# Altium PCB PROC091F.PcbDoc (part 6 of 8)
Units mil, origin at the board's own origin, x right, y up, seen from the top; angles counter-clockwise.
Board outline 3590.95 x 906.17 mil, 8 copper layers (Top Layer, GND1, Sig1, PWR1, PWR2, Sig2, GND2, Bottom Layer), stack 63.146 mil thick; 420 components, 316 nets, 1432 pads, 774 vias.
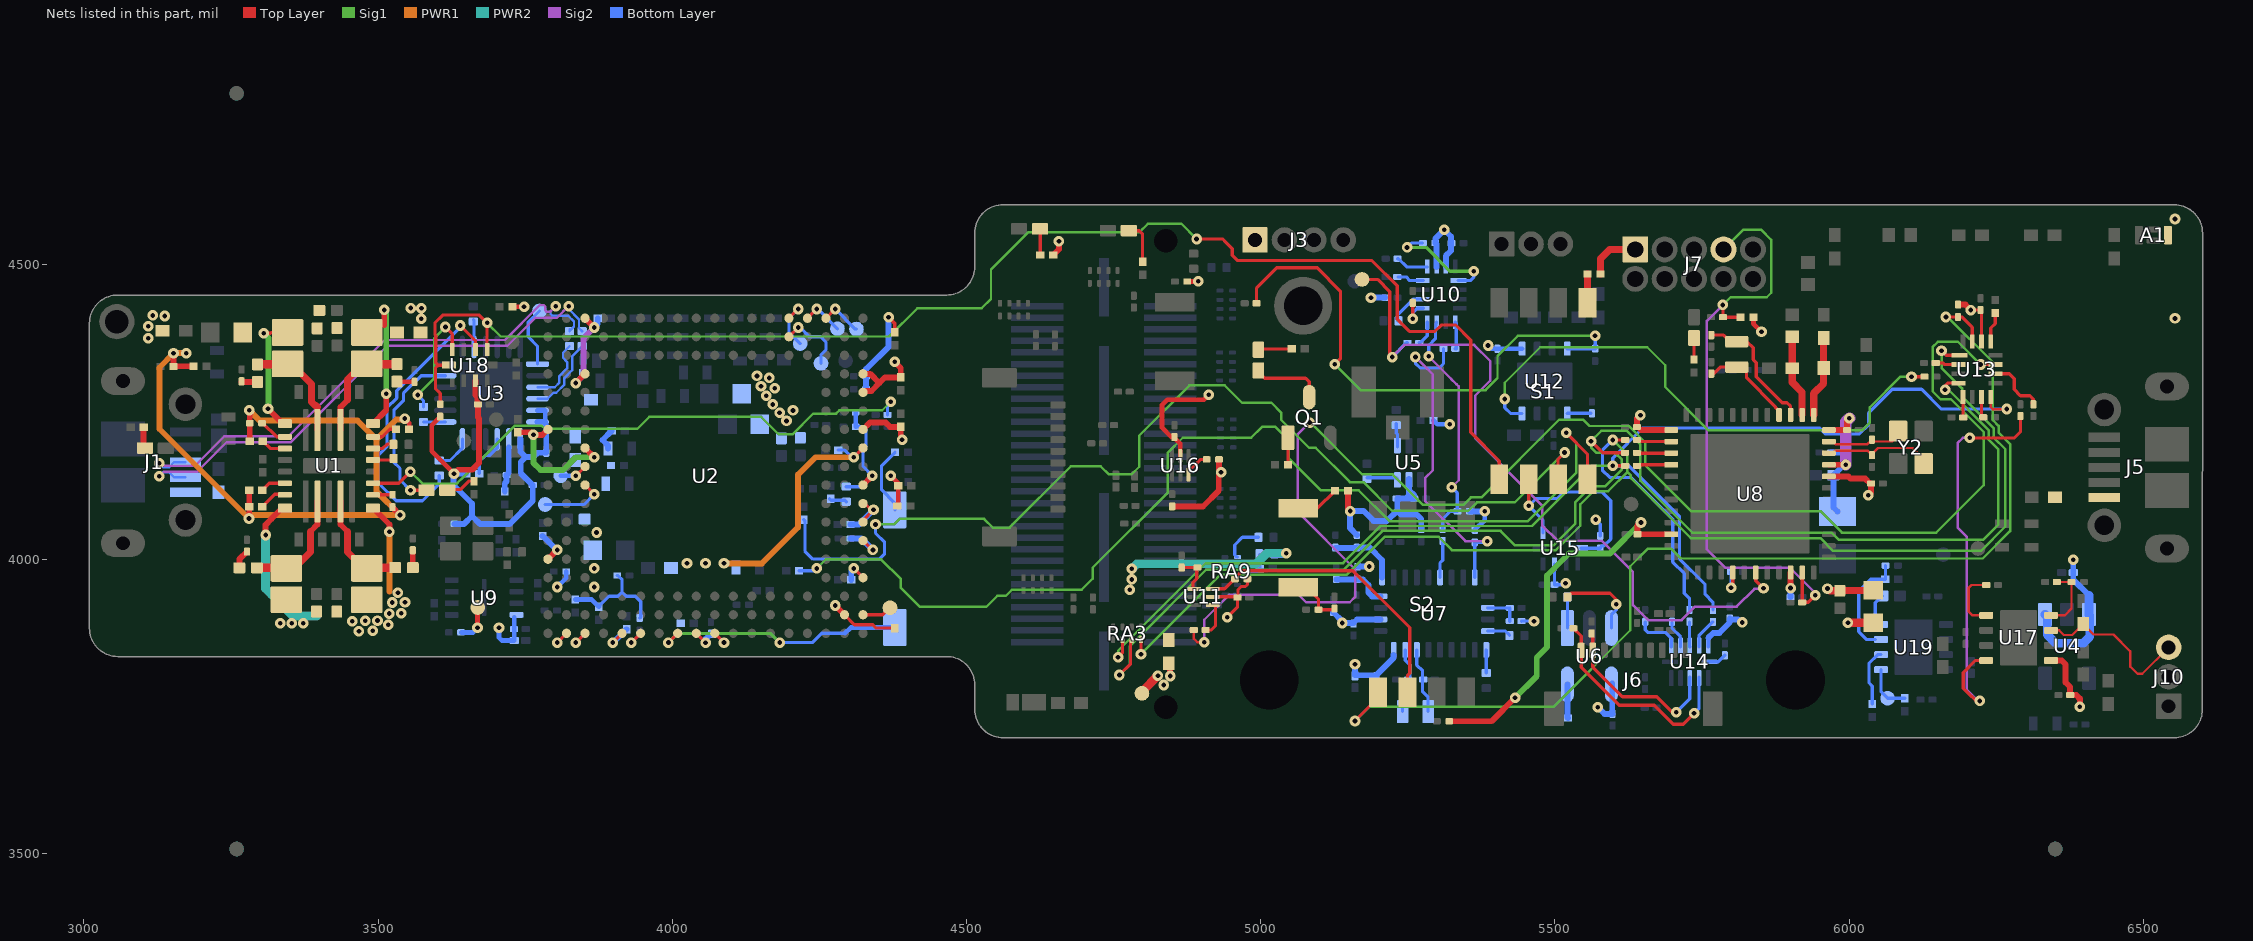
[diagram p11: the nets of this part, all layers, seen from the top]

## Via types
v1: diameter 18, hole 8, Top Layer to Bottom Layer, tented both sides, 737 vias
v2: diameter 19.68, hole 7.87, Top Layer to Bottom Layer, tented both sides, 36 vias
v3: diameter 17, hole 8, Top Layer to Bottom Layer, tented both sides, 1 vias

## Nets (pads, with @x,y where several pads share a name; then routed paths per layer and width w, separated by ;. In a path a pad name is that pad's centre, name@x,y a point inside that pad or via, vN(x,y) a via of type N, cw(c..) or ccw(c..) an arc to the next point about the centre after c; other vN are vias at no path point) (continued)
NetJ10_3: J10.3 R114.2 U17.7 | length 279.6
  Top Layer w4: U17.7@6343.09,3878.8 6356.9,3878.8 6364.64,3871.05 6379.2,3871.05 R114.2@6397.76,3889.61 6415.45,3871.92 6422.58,3871.92 6448.98,3871.92 6477.7,3843.2 6477.7,3817.28 6489.93,3805.05 6498.05,3805.05 J10.3@6543,3850
NetLD1_1: LD1.1 R39.2 | length 36.4
  Top Layer w10: R39.2@3101.69,4224 3101.69,4190.75 LD1.1@3103.94,4188.5
NetLD2_1: LD2.1 R13.2 | length 45.6
  Top Layer w5.5: R13.2@4625.39,4516.76 4625.39,4559.66 4626.81,4561.07 LD2.1@4627.29,4561.55
NetLD3_2: LD3.2 R42.1 | length 70.9
  Top Layer w5.5: LD3.2@4777.82,4558.15 4793.46,4558.15 4799.25,4552.36 R42.1@4799.25,4505.25
NetLD4_1: LD4.1 U3.17 | length 293.7
  Top Layer w5.5: v1(3555.07,4117.07) LD4.1@3582.28,4117.07
  Bottom Layer w5.5: v1(3555.07,4117.07) 3537.25,4134.89 3537.25,4154.13 3527,4164.38 3527,4252.77 3543.12,4268.88 3543.12,4281.51 3573.33,4311.72 U3.17@3614.31,4311.72
NetLD4_2: LD4.2 R15.2 | length 51.7
  Top Layer w5.5: LD4.2@3617.72,4117.07 3618.77,4118.12 3639.5,4118.12 3653.89,4132.51 R15.2@3663,4132.51
NetLD5_1: LD5.1 R107.2 | length 57.1
  Top Layer w5.5: LD5.1@4996.12,4355.74 4997.56,4357.18 R107.2@5052.59,4357.18
NetLD5_2: LD5.2 Q1.3 | length 121.4
  Top Layer w5.5: LD5.2@4996.12,4320.31 4996.12,4317.97 5006.72,4307.37 5076.23,4307.37 5082.37,4301.23 Q1.3@5082.37,4275.33
NetLD6_1: LD6.1 R17.2 | length 36.5
  Top Layer w5.5: R17.2@5736.37,4339.19 LD6.1@5736.37,4375.65
NetQ1_1: Q1.1 R108.2 | length 46.3
  Top Layer w5.5: R108.2@5046.35,4159.98 Q1.1@5046.35,4206.3
NetR2_2: R2.2 R174.1 | length 30.8
  Bottom Layer w5.5: R174.1@4267.1,4102.78 4269.74,4100.14 4271.74,4100.14 4293.06,4100.14 R2.2@4295.7,4097.5
NetR16_2: R16.2 S1.5 | length 49
  Top Layer w12: S1.5@5555.37,4435.46 R16.2@5555.37,4484.46
NetR20_2: R20.2 R29.2 U19.3 | length 178.8
  Bottom Layer w5.5: U19.3@6044.25,3863.26 6029.94,3863.26 6016.37,3876.83 6016.37,3945.46 6036.85,3965.94 R29.2@6061.35,3965.94 6061.6,3966.19 6061.6,3988.69 R20.2@6061.85,3988.94
NetR24_2: R24.2 U19.4 | length 62
  Bottom Layer w5.5: U19.4@6055.1,3888.6 6049.8,3888.6 6044.25,3894.15 6044.25,3926.09 6055.62,3937.46 R24.2@6056.47,3937.46
NetR27_2: R27.2 TP10.1 U19.1 | length 82.5
  Bottom Layer w5.5: U19.1@6054.25,3812.08 6054.25,3774.58 TP10.1@6065.37,3763.46 6094.48,3763.46 R27.2@6094.58,3763.57
NetR30_2: R30.2 U10.10 | length 65.1
  Bottom Layer w5.5: R30.2@5232.52,4404.87 5232.52,4415.19 5259.18,4441.85 U10.10@5276.29,4441.85
NetR40_2: R40.2 U3.9 | length 75.4
  Bottom Layer w5.5: R40.2@3671.81,4145.37 3671.81,4165.8 3681.85,4175.84 3689.03,4175.84 3702.45,4189.27 U3.9@3702.49,4203.87
NetR41_1: R41.1 U3.3 | length 115.3
  Bottom Layer w4: U3.3@3770.97,4292.04 3800.14,4292.04 3808.12,4300.03 3808.12,4311.17 3821.34,4324.39 3821.34,4334.97 3814.23,4342.08 3814.23,4350.59 3825.31,4361.66 R41.1@3825.31,4361.83
NetR51_2: R51.2 U5.1 | length 40.2
  Bottom Layer w5.5: R51.2@5230.37,4230.36 5230.37,4214.38 5232.29,4212.46 U5.1@5232.29,4190.93
NetR57_2: R57.2 U5.6 | length 52.4
  Bottom Layer w5.5: R57.2@5180.56,4138.17 5230.73,4138.17 U5.6@5232.29,4136.6
NetR58_2: R58.2 RA9.5 | length 68.7
  Bottom Layer w5.5: RA9.5@4960.68,4003.38 4959.62,4003.38 4956,4007 4956,4024 4968.94,4036.94 R58.2@4996.2,4036.94
NetR60_1: R60.1 U3.4 | length 133.5
  Bottom Layer w4: U3.4@3770.97,4272.35 3788.06,4272.35 3798.3,4282.59 3802.71,4282.59 3816.62,4296.51 3816.62,4307.65 3829.84,4320.87 3829.84,4344.29 3846.82,4361.26 R60.1@3846.82,4361.83
NetR61_2: R61.2 U3.13 | length 37.1
  Bottom Layer w5.5: R61.2@3577.24,4232.98 U3.13@3614.31,4232.98
NetR62_1: R62.1 U3.20 | length 47.1
  Bottom Layer w5.5: R62.1@3662,4407.2 3663.08,4406.12 U3.20@3663.12,4360.53
NetR63_1: R63.1 U3.12 | length 63.3
  Bottom Layer w5.5: R63.1@3604,4167.58 3622.29,4167.58 3643.43,4188.72 U3.12@3643.43,4203.87
NetR66_2: R66.2 R122.1 U12.8 | length 917.7
  Top Layer w5.5: R66.2@4992.9,4434.77 4992.9,4460.9 5027,4495 5096,4495 5135.53,4455.47 5135.53,4340.53 v1(5126,4331)
  Sig1 w4.2: v1(5126,4331) 5169.73,4287.27 5382.12,4287.27 5402.37,4307.51 5402.37,4345 5436.98,4379.61 v1(5568.26,4379.61)
  Bottom Layer w5.5: U12.8@5520.96,4357.63 R122.1@5568.37,4357.63 5568.37,4379.49 v1(5568.26,4379.61)
NetR67_2: R67.2 U6.1 | length 52.6
  Bottom Layer w5.5: U6.1@5521.17,3882.9 R67.2@5521.17,3935.46
NetR68_2: R68.2 U6.3 | length 142.4
  Top Layer w5.5: R68.2@5521.17,3935.46 5527.83,3942.12 5593.59,3942.12 5604.37,3931.35 v1(5604.37,3923.46)
  Bottom Layer w5.5: U6.3@5595.94,3882.87 5595.94,3905.07 5604.37,3913.5 v1(5604.37,3923.46)
NetR69_2: R69.2 U6.5 | length 57.6
  Bottom Layer w10: U6.5@5521.13,3787.16 5521.13,3730.92 R69.2@5522.09,3729.96
NetR70_1: R70.1 U7.19 | length 40.4
  Bottom Layer w5.5: U7.19@5385.92,3877.69 5416,3877.69 5422.58,3871.12 R70.1@5422.58,3870.14
NetR71_1: R71.1 U7.20 | length 39.5
  Bottom Layer w5.5: R71.1@5383.33,3806.26 5383.33,3845.57 U7.20@5383.46,3845.7
NetR72_2: R72.2 R73.2 U7.17 | length 60
  Bottom Layer w5.5: U7.17@5385.92,3917.06 R73.2@5423.36,3917.06 R72.2@5423.37,3894.46
NetR74_2: R74.2 U11.4 | length 56.4
  Top Layer w5.5: R74.2@4906.37,3879.46 4916.22,3879.46 4923.22,3886.46 4923.22,3919.14 U11.4@4920.42,3921.94
NetR76_1: R76.1 U14.8 | length 47.5
  Bottom Layer w5.5: R76.1@5698.97,3892.42 5698.97,3882.19 5713.48,3867.67 U14.8@5713.48,3850.95
NetR79_1: R79.1 U14.12 | length 32.5
  Bottom Layer w5.5: U14.12@5760.73,3825.36 5777.58,3825.36 R79.1@5788.67,3836.45
NetR86_2: R86.2 U8.15 | length 58.7
  Top Layer w5.5: R86.2@5639.23,4180.57 5639.8,4180.01 U8.15@5697.71,4180.01
NetR87_2: R87.2 U8.14 | length 59.5
  Top Layer w5.5: R87.2@5639.38,4202.46 5642.16,4199.69 U8.14@5697.71,4199.69
NetR92_1: R92.1 U19.2 | length 98.3
  Bottom Layer w5.5: R92.1@6039.37,3753.68 6039.37,3784.11 6033.69,3789.79 6033.69,3822.99 6048.37,3837.67 U19.2@6054.25,3837.67
NetR97_1: R97.1 U7.11 | length 63
  Bottom Layer w5.5: U7.11@5304.72,3968.74 5304.72,3993.45 5309.27,3998 R97.1@5309.27,4029.9
NetR99_1: R99.1 U10.12 | length 45.7
  Bottom Layer w5.5: R99.1@5233.13,4479.52 5247.22,4479.52 5253.4,4473.35 U10.12@5276.29,4473.35
NetR100_2: R100.2 U10.5 | length 48
  Bottom Layer w5.5: U10.5@5330.42,4402.48 5332.42,4400.48 5332.42,4357.63 5330.42,4357.63 R100.2@5330.67,4357.38
NetR101_1: R101.1 U10.13 | length 56.6
  Bottom Layer w5.5: R101.1@5232.37,4510.46 5234.17,4510.46 5248.14,4496.49 U10.13@5283.18,4496.49
NetR105_1: R105.1 R106.1 U11.1 | length 64.2
  Top Layer w5.5: R105.1@4865.78,3985.56 4891.33,3985.56 4891.33,3966.85 4884.99,3960.5 U11.1@4884.99,3949.5
NetR111_1: R111.1 SW3.2 | length 87.5
  Top Layer w5.5: SW3.2@5051.37,4086.32 5096.23,4086.32 R111.1@5126.37,4116.46
NetR112_2: R112.2 U10.8 | length 41.8
  Bottom Layer w5.5: R112.2@5269.37,4367.46 5271.17,4367.46 5283.18,4379.47 U10.8@5283.18,4402.48
NetR113_2: R113.2 U10.9 | length 58
  Top Layer w5.5: v1(5258.37,4408.46) R113.2@5258.37,4435.46
  Bottom Layer w5.5: v1(5258.37,4408.46) 5258.37,4418.25 5266.22,4426.11 U10.9@5275.3,4426.11 U10.9@5276.29,4426.11
NetR115_2: R115.2 R134.1 U17.8 | length 109.7
  Top Layer w4: U17.8@6343.09,3904.39 6366.36,3904.39 6377.97,3916 R134.1@6377.97,3961 R115.2@6352.99,3961
NetR116_1: R116.1 U17.1 | length 104.7
  Top Layer w4: U17.1@6232.85,3904.39 6209.58,3904.39 6202.97,3911 6202.97,3951 6207.97,3956 R116.1@6232.97,3956
NetR120_1: R120.1 U17.4 | length 709.3
  Top Layer w5.5: v1(6205,4206) 6281,4206 6291,4216 R120.1@6291,4242.98 ; v1@6223,3758 v1(6222,3759) 6216,3759 6208.01,3766.99 6207.53,3766.99 6194,3780.52 6194,3807.03 6214.58,3827.61 U17.4@6232.85,3827.61
  Sig2 w4.2: v1(6205,4206) 6193,4206 6184.36,4197.36 6184.36,4053.64 6199.58,4038.42 6199.58,3778.41 6218.99,3759 v1(6222,3759)
NetR121_1: R121.1 U13.2 | length 39.5
  Top Layer w5.5: R121.1@6147.25,4333.23 6159.77,4333.23 6162.37,4330.63 U13.2@6185.63,4330.63
NetR123_1: R123.1 U12.1 | length 40.6
  Bottom Layer w5.5: U12.1@5520.96,4247.39 5521.31,4247.74 R123.1@5561.37,4247.74
NetR125_2: R125.2 R129.1 SW3.1 | length 103.2
  Top Layer w5.5: SW3.1@5051.37,3952.46 5077.69,3952.46 5098.17,3931.98 R125.2@5098.17,3914.04 5123.33,3914.04 R129.1@5125.2,3915.92 ; R129.1@5123.7,3917.42 R129.1@5125.2,3918.92
NetR127_1: R127.1 U12.4 | length 947.1
  Top Layer w5.5: v1(6106,4310) R127.1@6127.98,4310
  Sig1 w4.2: v1(5414.67,4272) 5414.67,4299.67 5475,4360 5656.88,4360 5687.4,4329.48 5687.4,4292.6 5761.21,4218.79 6021.79,4218.79 6035.3,4232.3 6035.3,4258 6087.3,4310 v1(6106,4310)
  Bottom Layer w5.5: v1(5414.67,4272) 5414.67,4257.46 5424.74,4247.39 U12.4@5444.19,4247.39
NetR128_1: R128.1 U13.5 | length 35
  Top Layer w5.5: U13.5@6193.5,4275.51 6193.5,4241.13 R128.1@6193.93,4240.71
NetR131_2: R131.2 U8.29 | length 53.8
  Top Layer w5.5: v1(5799.35,3951.46) 5802.04,3954.16 U8.29@5802.04,3977.25
  Bottom Layer w5.5: v1(5799.35,3951.46) R131.2@5799.35,3978.41
NetR136_1: R136.1 U13.7 | length 35.8
  Top Layer w5.5: U13.7@6225,4275.51 6225,4244 R136.1@6228,4241
NetR139_1: R139.1 U13.10 | length 104.2
  Top Layer w5.5: U13.10@6248.62,4314.88 6272,4314.88 6280.5,4306.38 6280.5,4288.27 6291.05,4277.72 6307.28,4277.72 6313,4272 R139.1@6313,4263 R139.1@6311.28,4264.72
NetR141_1: R141.1 U13.13 | length 51.3
  Top Layer w5.5: U13.13@6240.75,4370 6240.75,4392.75 6248.22,4400.22 R141.1@6248.22,4418.23
NetR160_1: R160.1 U14.10 | length 52.7
  Bottom Layer w5.5: U14.10@5744.98,3850.95 5744.98,3870.7 5745.08,3870.7 5766.49,3892.11 5766.49,3892.21 5767.54,3893.26 R160.1@5768.53,3893.26
NetR161_2: R161.2 U8.16 | length 59.1
  Top Layer w5.5: R161.2@5639.38,4158.46 5641.24,4160.32 U8.16@5697.71,4160.32
NetR166_1: R166.1 U14.9 | length 41.8
  Bottom Layer w5.5: R166.1@5728.8,3892.57 5728.8,3851.38 U14.9@5729.23,3850.95
NetR168_1: R168.1 U14.7 | length 77.4
  Bottom Layer w5.5: R168.1@5653.43,3892.54 5653.43,3879.64 5657.71,3875.36 5687.51,3875.36 5697.73,3865.14 U14.7@5697.73,3850.95
NetR176_1: R176.1 S3.1 | length 117
  Bottom Layer w5.5: S3.1@4378.33,4083.66 4378.33,4095.26 4355.69,4117.91 4355.69,4158.92 R176.1@4378.58,4181.8
NetR178_2: R178.2 U16.3 | length 44.7
  Top Layer w5.5: U16.3@4877.15,4143.71 4877.15,4148.84 4897.78,4169.46 R178.2@4908.17,4169.46
NetTP2_1: TP2.1 U2.C10 | length 47.8
  Top Layer w5.5: v1(3836.01,4141.61) U2.C10@3851.76,4157.36
  Bottom Layer w8: TP2.1@3810.59,4141.77 3835.85,4141.77 v1(3836.01,4141.61)
NetTP3_1: TP3.1 U2.C9 | length 113
  Top Layer w5.5: U2.C9@3851.76,4125.86 v1(3867.5,4110.11)
  Bottom Layer w5.5: TP3.1@3784,4092.76 3850.15,4092.76 v1(3867.5,4110.11)
NetTP6_1: TP6.1 U2.T18 | length 72.5
  Top Layer w5.5: U2.T18@4261.2,4409.33 v1(4276.95,4425.07)
  Bottom Layer w5.5: v1(4276.95,4425.07) 4311.08,4390.94 TP6.1@4313,4390.94
NetTP7_1: TP7.1 U2.R18 | length 71.4
  Top Layer w5.5: U2.R18@4229.71,4409.33 v1(4245.46,4425.07)
  Bottom Layer w5.5: v1(4245.46,4425.07) 4247.21,4425.07 TP7.1@4280.69,4391.59
NetTP8_1: TP8.1 U2.P17 | length 119.4
  Top Layer w5.5: U2.P17@4198.21,4377.83 v1(4213.96,4393.58)
  Bottom Layer w5.5: v1(4213.96,4393.58) 4217.13,4393.58 4232.89,4377.82 4251.98,4377.82 4261.2,4368.6 4261.2,4355.7 4252.7,4347.19 TP8.1@4252.7,4332.6
NetTP9_1: TP9.1 U2.P18 | length 95.6
  Top Layer w5.5: U2.P18@4198.21,4409.33 v1(4213.96,4425.07)
  Bottom Layer w5.5: v1(4213.96,4425.07) 4198.22,4409.33 4198.22,4385.27 TP9.1@4217.3,4366.19
NetTP11_1: TP11.1 U2.V2 | length 50.8
  Top Layer w5.5: U2.V2@4324.2,3905.39 4358.02,3905.39 TP11.1@4370,3917.37
NetTP26_1: TP26.1 U3.1 | length 104.7
  Bottom Layer w5.5: U3.1@3770.97,4331.41 3770.97,4362.04 3755.27,4377.75 3755.27,4402.47 TP26.1@3774.42,4421.63
nRESET: C37.1 J7.7 R89.1 R91.1 U8.35 | length 1057.2
  Top Layer w5.5: v1(5785.39,4431.94) C37.1@5785.39,4411.08 R89.1@5815.36,4411.08 ; U8.35@5920.15,3977.25 R91.1@5920.15,3926.46 5930.43,3926.46 v1(5942.41,3938.44)
  Sig1 w4.2: v1(5785.39,4431.94) 5798.5,4445.04 5859.97,4445.04 5867.61,4452.68 5867.61,4542.36 5849.97,4560 5820.28,4560 J7.7@5786.47,4526.19
  Sig2 w4.2: v1(5785.39,4431.94) 5758.35,4404.89 5758.35,4016.29 5789.04,3985.6 5899.11,3985.6 5942.41,3942.3 v1(5942.41,3938.44)
PGOOD: R31.1 R37.2 RA9.7 | length 66.9
  Bottom Layer w5.5: RA9.7@4960.68,3971.89 4961.37,3972.58 4970.57,3972.58 4974.12,3976.14 4978.8,3976.14 4982,3979.33 4994.2,3979.33 R37.2@4998.2,3983.33 R31.1@4998.2,4008
PMIC_1V0: C46.1 C49.1 C54.1 L4.1 L12.1 L14.1 U1.1 | length 153.6
  Top Layer w10: U1.1@3491.41,4086.67 3519.37,4058.71 v1(3519.37,4046.65)
  PWR1 w10: 3519.37,3944.69 v1(3519.37,4046.65)
  other v1: 3467.48,3877.51 3491.19,3878.19 3517.25,3888.26 3456.15,3894.32 3478.45,3895.02 3499.06,3895.51 3518.86,3907.41 3539.19,3908.06 3524.08,3926.16 3545.78,3926.72 3533.81,3942.78 4194.19,4234.78 4182.39,4248.85 4205.2,4252.61 4170.91,4262.86 4159.95,4277.76 4174.38,4290.49 4150.85,4293.59 4164.94,4307.84 4143.91,4311.32
PMIC_1V2: C45.1 C77.1 L3.1 L13.1 U1.14 | length 216.3
  Top Layer w5.5: v1@3313.92,4383.94 3316.96,4383.94 3318.07,4385.05 L3.1@3346.24,4385.05 L3.1@3358.24,4385.05 ; U1.14@3337.87,4230.37 U1.14@3341.81,4230.37
  Top Layer w10: v1(3312.99,4255.25) U1.14@3337.87,4230.37
  Sig1 w10: v1(3305.92,4383.94) 3313.92,4375.94 3313.92,4256.18 v1(3312.99,4255.25)
PMIC_1V2_FILTERED: C91.1 C92.1 C94.1 C95.1 C96.1 C97.1 C98.1 C103.1 FL6.2 U2.A5 U2.C1 U2.E1 U2.J1 U2.V4 U2.V6 U2.V7 U2.V8 U2.V12 U2.V14 U2.V15 | length 622
  Top Layer w5.5: v1(3836.01,3858.15) U2.C1@3851.76,3873.89 ; v1(3899,3858.15) U2.E1@3914.75,3873.89 ; U2.J1@4040.84,3873.78 v1(4056.59,3858.04) ; v1(4308.45,3984.13) U2.V4@4324.2,3968.38 ; U2.V6@4324.2,4031.37 v1@4339.94,4015.63 ; U2.V7@4324.2,4062.87 4324.2,4065.87 v1(4341.94,4083.62) 4339.55,4086.01 4335.33,4086.01 4326.97,4094.37 U2.V8@4324.2,4094.37
  Top Layer w10: U2.A5@3788.76,3999.88 v1(3804.51,4015.63) ; U2.V12@4324.2,4220.35 4335.73,4231.88 4362.85,4231.88 4370,4224.73 C96.1@4388.37,4224.73 4388.37,4205.15 v1(4390.55,4202.96) ; U2.V14@4324.2,4283.34 4324.2,4285.59 4338.42,4285.59 4352,4299.17 ; U2.V15@4324.2,4314.84 4336.34,4314.84 4352,4299.17 ; v1(4378,4335.17) 4388.37,4324.81 C98.1@4388.37,4308.78 4361.61,4308.78 4352,4299.17
  Bottom Layer w10: C97.1@3779.79,4039.17 3803.34,4015.63 v1(3804.51,4015.63) ; v1(3899,3858.15) 3899.78,3858.15 C95.1@3922.37,3880.73 ; v1(4056.59,3858.04) 4056.59,3863.94 C92.1@4065.74,3873.08 ; C91.1@4303,4035.17 4321.4,4035.17 v1(4340.94,4015.63) ; C103.1@4303,4058.8 4317.13,4058.8 v1(4341.94,4083.62) ; C94.1@4304.21,3964.68 4304.21,3979.89 v1(4308.45,3984.13)
  other v1: 3109.58,4375.35 3109.39,4395.84 3137.27,4413.1 3117.35,4414.06
PMIC_1V8: C47.1 C48.1 L5.1 L11.1 U1.21 | length 258.9
  Top Layer w10: v1(3309,4041) 3309,4058.32 3319,4068.32 3337.35,4086.67 U1.21@3341.81,4086.67
  PWR2 w15: v1(3309,4041) 3309,3950.08 3319,3940.08 3356.06,3903.02 3395.6,3903.02
  other v1: 3333.85,3890.74 3353.35,3890.74 3372.84,3890.74 3867.5,3952.63 3867.5,3984.13 3871.34,4045.2
PMIC_3V3: C44.1 FL20.2 L2.1 U1.8 | length 229.5
  Top Layer w10: U1.8@3491.41,4230.37 3513.87,4252.83 v1(3513.87,4281) ; 3510.62,4397.75 v1(3510.62,4423.47)
  Sig1 w10: v1(3510.62,4423.47) 3513.87,4420.22 v1(3513.87,4281)
PMIC_CLK: R103.2 U1.3 | length 1007.7
  Top Layer w5.5: U1.3@3491.41,4128.99 3535.47,4128.99 v1(3555,4148.52)
  Sig1 w4.2: v1(3555,4148.52) 3575.22,4128.3 3633.73,4128.3 3635.41,4129.97 ; 3635.45,4129.97 3644.41,4138.94 ; 3644.41,4138.98 3731.89,4226.46 3778.57,4226.46 3783.54,4221.5 3940.72,4221.5 3960.9,4241.68 4151.25,4241.68 4180.97,4211.97 4204.31,4211.97 4239.64,4247.29 4278.29,4247.29 4283.99,4252.99 4356.92,4252.99 v1(4371.44,4267.52)
  Bottom Layer w5.5: R103.2@4365.65,4245.1 4365.65,4261.72 v1(4371.44,4267.52)
PMIC_EN1: R34.1 U1.7 | length 44.4
  Top Layer w5.5: U1.7@3491.41,4207.73 3507.24,4207.73 3520.15,4220.64 R34.1@3530.48,4220.64
PMIC_EN2: R35.1 U1.15 | length 48.4
  Top Layer w5.5: R35.1@3303.04,4231 3304.38,4231 3327.64,4207.73 U1.15@3341.81,4207.73
PMIC_EN3: R36.1 U1.2 | length 33.2
  Top Layer w5.5: U1.2@3491.41,4109.31 R36.1@3524.56,4109.31
PMIC_NINT: R26.1 U1.19 | length 43.6
  Top Layer w5.5: R26.1@3303.16,4116.99 3315.16,4128.99 U1.19@3341.81,4128.99
PMIC_NRST: R33.1 U1.20 | length 47.8
  Top Layer w5.5: R33.1@3303.16,4088.65 3324.5,4110 3341.11,4110 U1.20@3341.81,4109.31
PMIC_PGOOD: R25.1 U1.16 | length 43
  Top Layer w5.5: R25.1@3304,4200.49 3316.45,4188.05 U1.16@3341.81,4188.05
PMIC_SCL: R32.2 U1.5 | length 36
  Top Layer w5.5: U1.5@3491.41,4168.36 3523.7,4168.36 R32.2@3526.34,4171
PMIC_SDA: R28.2 U1.6 | length 37.7
  Top Layer w5.5: U1.6@3491.41,4188.05 3508.15,4188.05 3515.6,4195.5 R28.2@3526,4195.5
PMICOUT_3V3: C2.2 C3.2 C87.1 C88.1 C100.1 C101.1 C102.1 C126.1 FL20.1 FL22.1 R2.1 R4.1 R5.1 R7.2 R8.2 R9.1 R19.2 R21.2 R22.2 R23.2 R31.2 R40.1 R43.2 R44.2 R45.2 R59.2 R75.1 S3.2 TP5.1 U2.H1 U2.V9 U3.5 U3.6 U3.7 U9.8 U18.8 | length 2389.6
  Top Layer w5.5: v1(3993.49,3858.15) U2.H1@4009.24,3873.89
  Top Layer w6: v1(4367.63,4410.91) 4378.13,4400.41 R5.1@4378.13,4385.29
  Top Layer w8: R19.2@3605.65,4241.65 3591.37,4227.36 3591.37,4183.02 v1(3629.11,4145.27) ; v1(3669.07,3883.19) 3669.07,3917.49 TP5.1@3669.3,3917.72 ; R4.1@3728.57,4429.01 3748.07,4429.01 v1(3748.13,4428.95) ; v1(4371.44,4141.61) 4383.88,4129.17 C88.1@4383.88,4124.76 4383.88,4094.76 C102.1@4379.37,4090.24
  Top Layer w10: v1(3629.11,4145.27) 3635.73,4151.89 3659.99,4151.89 3671.7,4163.61 3671.7,4239.21 3669.91,4241 C126.1@3669.91,4262.91 3668.9,4261.9 3668.9,4275.32 3665.64,4278.59 U18.8@3665.64,4303.01 ; U2.V9@4324.2,4125.86 v1(4339.94,4141.61)
  Sig1 w5.5: v1(3993.49,3858.15) 4008.74,3873.4 4167.21,3873.4 v1(4182.46,3858.15)
  PWR2 w15: v1(4780.64,3983.52) 4781.14,3983.52 4789.76,3992.13 4992.13,3992.13 5009.96,4009.96 v1(5043.37,4009.96)
  Bottom Layer w5.5: R75.1@3875.37,3918.83 3875.37,3919.78 3892.48,3936.89 3907.55,3936.89 3914.61,3943.95 ; R8.2@3906.38,3972.12 3907.67,3972.12 3914.74,3965.05 3914.74,3944.08 3914.61,3943.95 ; R7.2@3944.52,3899.73 3946.24,3901.44 3946.24,3927.66 3937.02,3936.88 3921.68,3936.88 3914.61,3943.95 ; v1(4182.46,3858.15) 4238.15,3858.15 4253.89,3873.89 4293.39,3873.89 ; R2.1@4295.7,4123.1 4321.43,4123.1 v1(4339.94,4141.61) 4324.2,4157.36 4324.2,4186.5 4329,4191.3 4329,4220.2 4324.44,4224.76 R59.2@4311.76,4224.76
  Bottom Layer w8: R43.2@3641.22,3875.43 3661.3,3875.43 v1(3669.07,3883.19) ; v1(3705.55,3883.32) 3705.55,3866.38 3710.23,3861.69 C100.1@3731.37,3861.69 U9.8@3731.37,3901.12 ; U3.5@3770.97,4252.67 3783.91,4252.67 U3.6@3783.91,4232.98 ; v1(3804.51,3952.63) 3819.73,3967.86 R45.2@3819.73,3978.91 ; R9.1@3835,3931.22 3862.97,3931.22 R75.1@3875.37,3918.83 ; 4293.39,3873.89 4303.2,3883.7 S3.2@4378.13,3883.7 ; R59.2@4311.76,4224.76 R23.2@4311.76,4249.29 ; v1(4777.34,3947.7) v1@4777.56,3947.48
  Bottom Layer w10: R44.2@3629.89,4059.85 3646.26,4059.85 3659.8,4073.39 ; R40.1@3649.76,4145.37 3628.21,4145.37 3628.11,4145.27 3628.11,4126.02 3659.8,4094.33 3659.8,4073.39 ; U3.7@3741.86,4203.87 3741.86,4182.84 3751.18,4173.52 ; U3.6@3770.97,4232.98 3783.91,4232.98 3783.91,4229.09 3785.88,4227.12 C2.2@3785.88,4180.75 3771.42,4180.75 3764.16,4173.52 3751.18,4173.52 ; R22.2@4329.48,4288.76 R21.2@4329.48,4310.76 4329.48,4322.94 4367.63,4361.09 v1(4367.63,4410.91) ; 3659.8,4073.39 3673.75,4059.44 3723.24,4059.44 3762.94,4099.14 C3.2@3762.94,4125.72 3742.56,4146.1 3742.56,4164.9 3751.18,4173.52
  Bottom Layer w15: R31.2@5023.3,4008.93 5023.67,4009.31 5041.9,4009.31 5042.56,4009.96 v1(5043.37,4009.96)
  other v1: 4780.6,3965.46 3573.52,4408.24 3573.7,4426.43 3555.52,4426.61
PMICVIO_3V3: R25.2 R26.2 R33.2 R34.2 R35.2 R36.2 R50.1 R52.2 | length 1279.6
  Top Layer w8: v1(3545.33,4238.82) 3553.02,4231.13 R34.2@3553.02,4218.5
  Top Layer w10: v1(3152.43,4349.59) R52.2@3152.43,4327.36 3152.8,4327.73 R50.1@3186.38,4327.73 ; v1(3280.71,4069) 3281.11,4069.4 R33.2@3281.11,4088.65 R26.2@3281.11,4116.99 ; v1(3281.33,4253) 3282,4253 R35.2@3282,4231 R35.2@3282,4231 R25.2@3281.95,4200.49 ; R36.2@3524.26,4087.97 v1(3537.4,4074.84)
  PWR1 w10: v1(3174.29,4349.96) 3152.8,4349.96 v1(3152.43,4349.59) 3128.56,4325.73 3128.56,4221.15 v1(3280.71,4069) 3286.55,4074.84 v1(3537.4,4074.84) 3497.61,4114.63 3497.61,4202.73 ; v1(3281.33,4253) 3299.07,4235.25 3465.09,4235.25 3497.61,4202.73 ; v1@3546.33,4237.27 3530.99,4237.27 3497.61,4203.89 3497.61,4202.73
PS0: R77.2 R93.1 U7.6 | length 117.9
  Bottom Layer w10: R93.1@5126.93,4019.06 R77.2@5163.41,4019.06 ; R77.2@5163.43,4019.54 5185.29,4019.54 5206.22,3998.62 5206.22,3968.81 U7.6@5206.3,3968.74
PS1: R78.2 R98.1 U7.5 | length 94.8
  Bottom Layer w10: R98.1@5128.47,3965.22 5128.56,3965.32 5164.52,3965.32 5173.79,3965.32 5183.14,3955.97 5183.14,3943.02 5189.41,3936.75 U7.5@5203.84,3936.75
RE: A1.1
  other v1: 6553.69,4409 6553.69,4578
RESETN: R94.1 U10.1 | length 198.6
  Sig1 w5.5: v1(5248.71,4529.61) 5281.03,4529.61 5321.61,4489.04 v1(5362.03,4489.04)
  Bottom Layer w5.5: v1(5248.71,4529.61) 5256.18,4537.08 R94.1@5275.16,4537.08 ; U10.1@5335.34,4473.35 5356.12,4473.35 5362.03,4479.26 v1(5362.03,4489.04)
RF_N: C23.1 L6.1 U8.2 | length 139.8
  Top Layer w12: L6.1@5903.37,4377.75 5903.28,4377.66 C23.1@5903.28,4324.42 5903.28,4300.45 5920.15,4283.58 U8.2@5920.15,4244.97
RF_P: C22.2 L1.1 U8.1 | length 137.8
  Top Layer w12: U8.1@5939.84,4244.97 5939.84,4281.73 5956.71,4298.6 L1.1@5956.71,4324.41 C22.2@5956.7,4375.79
SENS_INT: R18.2 R100.1 U7.14 | length 567.6
  Sig2 w4.2: v1(5262.94,4343.4) 5292.48,4313.87 5292.48,4151.03 5279.43,4137.99 5279.43,4098.76 5347.73,4030.46 v1(5384.96,4030.46)
  Bottom Layer w5.5: v1(5262.94,4343.4) 5262.94,4333.01 5271.25,4324.69 5303.04,4324.69 5310.65,4332.3 R100.1@5310.65,4357.38 ; U7.14@5363.78,3968.74 R18.2@5363.78,4028.46 5381.91,4028.46 5383.91,4030.46 v1(5384.96,4030.46)
SENS_NRST: R81.2 R97.2 U10.7 | length 404.5
  Sig2 w4.2: v1(5285.37,4344.73) 5323.7,4306.4 5323.7,4306.04 5332.66,4297.07 5333.03,4297.07 5336.56,4293.54 5336.56,4134.06 v1(5324.41,4121.9)
  Bottom Layer w5.5: v1(5285.37,4344.73) 5285.37,4362.56 5296.92,4374.11 5296.92,4387.55 5297.74,4388.36 5297.74,4401.3 U10.7@5298.93,4402.48 ; R97.2@5309.27,4050.94 5309.27,4068.09 5322.37,4081.19 5333.89,4081.19 5333.89,4112.42 v1(5324.41,4121.9)
SOP0: R159.2 S1.3 | length 1765.9
  Top Layer w5.5: S1.3@5505.37,4135.46 5505.37,4170.08 v1(5516.37,4181.08)
  Sig1 w4.2: v1(4345.4,4058.9) 4376.9,4058.9 4386.3,4068.3 4529.8,4068.3 4544.6,4053.5 4573.3,4053.5 4677.5,4157.7 4728,4157.7 4741.9,4143.8 4780.4,4143.8 4793.6,4157 4793.6,4209.9 4878.9,4295.2 4938.86,4295.2 4968.4,4265.66 5018.16,4265.66 5034.8,4249.02 5034.8,4236.8 5082.3,4189.3 5093.2,4189.3 5151.65,4130.85 5174.55,4130.85 5223.5,4081.9 5352.7,4081.9 5367.29,4096.49 5431.78,4096.49 v1(5516.37,4181.08)
  Bottom Layer w5.5: R159.2@4223.5,4067.08 4225.4,4065.18 4225.4,4013.55 4238.97,3999.98 4351.98,3999.98 4360.8,4008.8 4360.8,4028.8 4345.4,4044.2 v1(4345.4,4058.9)
SOP1: R171.2 S1.4 | length 1835.5
  Top Layer w5.5: v1(5519.37,4214.46) 5555.37,4178.46 S1.4@5555.37,4135.46
  Sig1 w4.2: v1(4245.46,3984.13) 4260.76,3999.43 4355.03,3999.43 4388.5,3965.96 4388.5,3950.96 4420.67,3918.79 4533.64,3918.79 4552.58,3937.72 4567.09,3937.72 4577.22,3947.85 4695.47,3947.85 4714.6,3966.98 4714.6,3985.6 4842.2,4113.2 4842.2,4180.88 4867.55,4206.23 4983.79,4206.23 5002.26,4224.7 5025,4224.7 5047,4202.7 5047,4172 5102.36,4116.64 5166.64,4116.64 5218.64,4064.64 5454.22,4064.64 5536.6,4147.02 5536.6,4197.23 v1(5519.37,4214.46)
  Bottom Layer w5.5: R171.2@4215.47,3980.18 4241.5,3980.18 v1(4245.46,3984.13)
SPI/CAN_MUX_CTRL: R118.1 S2.1 U13.15 | length 1875.8
  Top Layer w5.5: v1(5160.25,3724.93) 5199.37,3764.05 S2.1@5199.37,3773.46 ; v1(6164.48,4411.48) R118.1@6185,4411.48 6191.52,4411.48 6209.25,4393.75 U13.15@6209.25,4370
  Sig1 w4.2: v1(5160.25,3724.93) 5184.05,3748.73 5497.64,3748.73 5628,3879.09 5628,3987.76 5658,4017.76 5697.24,4017.76 5714,4001 6227,4001 6273.6,4047.6 6273.6,4195.4 6253.9,4215.1 6253.9,4226.25 6244,4236.15 6244,4334.64 6167.16,4411.48 v1(6164.48,4411.48)
SPI_CLK1: R160.2 R161.1 RA3.2 U13.8 | length 2179.9
  Top Layer w4.2: U13.8@6240.75,4275.51 6240.75,4258.25 6244,4255 v1(6268,4255)
  Top Layer w5.5: v1(4757.56,3832.95) 4765.06,3840.45 RA3.2@4765.06,3863.01 ; v1(5598.37,4158.46) R161.1@5619.36,4158.46
  Sig1 w4.2: v1(4757.56,3832.95) 4757.56,3844.16 4906.55,3993.15 5140.15,3993.15 5203.24,4056.24 5460.94,4056.24 5563.16,4158.46 v1(5598.37,4158.46)
  Bottom Layer w5.5: R160.2@5768.53,3913.29 5768.53,3926.85 5755.12,3940.26 5755.12,3956.82 5711.87,4000.07 5711.87,4072.39 5625.79,4158.46 v1(5598.37,4158.46) 5598.37,4171.72 5649.65,4223 5949,4223 5959.38,4212.62 6017.62,4212.62 6033,4228 6033,4248.48 6073.27,4288.75 6123.15,4288.75 6156.9,4255 v1(6268,4255)
SPI_CLK1_T: J6.1 R185.1 U14.2 | length 376.8
  Top Layer w5.5: R185.1@5531.37,3882.46 5544.58,3869.25 J6.1@5544.58,3845.06 5544.58,3815.96 5608.98,3751.57 5668.75,3751.57 5700.85,3719.47 5717.97,3719.47 v1(5736.47,3737.96)
  Bottom Layer w5.5: v1(5736.47,3737.96) 5744.98,3746.48 U14.2@5744.98,3799.77
SPI_CS1: R74.1 U13.11 | length 2511.8
  Top Layer w4.2: R74.1@4886.35,3879.46 4886.35,3864.65 4892.11,3858.89 v1(4904,3858.89)
  Top Layer w5.5: v1@6224.37,4330.63 U13.11@6248.62,4330.63
  Sig1 w4.2: v1(5083,4232) 5084.53,4232 5172.53,4144 5224,4144 5275.8,4092.2 5344.6,4092.2 5357.29,4104.89 5375.16,4104.89 5507.27,4237 5548,4237 5558.84,4226.16 5625.72,4226.16 5653.37,4198.51 5653.37,4159.76 5731.52,4081.6 5951,4081.6 5987.6,4045 6148,4045 6228.7,4125.7 6228.7,4215.82 6172.82,4271.7 6155.3,4271.7 6141.7,4285.3 6141.7,4360.34 6150.66,4369.3 6184.7,4369.3 v1(6223.37,4330.63)
  Sig2 w4.2: v1@4900.71,3862.18 v1(4904,3858.89) 4904,3897 4946.3,3939.3 5064.58,3939.3 5077.18,3926.7 5151.31,3926.7 5160.27,3935.67 5160.27,3982.73 5063.3,4079.7 5063.3,4212.3 v1(5083,4232) v1@5084,4232
SPI_CS_MUX_CTRL: R104.1 S2.2 U11.6 | length 500.3
  Top Layer w5.5: U11.6@4918.45,3949.5 4938.62,3949.5 4955.08,3965.95 R104.1@4956.37,3965.95 4956.37,3968.15 4968.29,3980.07 5156.77,3980.07 5253.12,3883.71 5253.12,3805.71 5249.37,3801.96 S2.2@5249.37,3773.46
SPI_MISO1: R87.1 R166.2 RA3.4 U13.1 | length 2579.9
  Top Layer w5.5: v1(4796.56,3838.48) RA3.4@4796.56,3863.01 ; v1(5598.37,4202.46) R87.1@5619.36,4202.46 ; v1@6157,4355 v1(6157,4354) 6164.62,4346.38 U13.1@6187.6,4346.38
  Sig1 w4.2: v1(4796.56,3838.48) 4931.73,3973.65 5146.65,3973.65 5210.61,4037.61 5302.6,4037.61 5325.05,4015.16 5391.3,4015.16 5391.53,4015.4 5428.31,4015.4 5428.92,4014.79 5501.22,4014.79 5543,4056.58 5543,4093 5565.29,4115.29 5590.29,4115.29 5623,4148 ; v1(5598.37,4202.46) 5623,4177.83 5623,4148 ; v1(6157,4354) 6157,4325 6192,4290 6192,4276.28 6245.5,4222.78 6245.5,4206.5 6265.2,4186.8 6265.2,4055.2 6224,4014 5972.71,4014 5951,4035.71 5730.76,4035.71 5629,4137.48 5629,4142 5623,4148
  Bottom Layer w5.5: v1(5598.37,4202.46) 5580.62,4184.71 5580.62,4151.11 5592.98,4138.75 5629.24,4138.75 5700.37,4067.62 5700.37,3994.93 5719.62,3975.68 5719.62,3942.11 5728.8,3932.93 R166.2@5728.8,3913.6
SPI_MISO1_T: J6.2 R184.1 U14.3 | length 300.7
  Top Layer w5.5: R184.1@5562.38,3872.76 5564.27,3870.87 5564.27,3842.06 5564.27,3816.4 5614.75,3765.92 5673.29,3765.92 5699.72,3739.48 v1(5706.06,3739.48)
  Bottom Layer w5.5: v1(5706.06,3739.48) 5729.23,3762.65 U14.3@5729.23,3799.77
SPI_MOSI1: R86.1 RA3.3 U13.4 | length 2405.9
  Top Layer w5.5: v1(4759.94,3802.97) 4778.81,3821.84 4778.81,3861.01 RA3.3@4780.81,3863.01 ; v1(5561.37,4200.36) 5581.16,4180.57 R86.1@5619.21,4180.57 ; v1(6163,4288) 6163,4294.5 6167.63,4299.13 U13.4@6185.63,4299.13
  Sig1 w4.2: v1(4759.94,3802.97) 4777,3820.03 4777,3851.72 4907.53,3982.25 5141.25,3982.25 5206.84,4047.84 5407.74,4047.84 5432.4,4023.19 5497.74,4023.19 5534.35,4059.8 5534.35,4096.23 5562.3,4124.18 5585.72,4124.18 5613.67,4152.13 5613.67,4169.16 5602.37,4180.46 5570.47,4180.46 5561.37,4189.56 v1(5561.37,4200.36) 5578.77,4217.76 5622.24,4217.76 5644.97,4195.03 5644.97,4133.39 5733.44,4044.92 5970.08,4044.92 5982,4033 6228,4033 6253.7,4058.7 6253.7,4186.42 6237.1,4203.02 6237.1,4219.3 6168.4,4288 v1(6163,4288)
SRDY: R112.1 TP27.1 U8.31 | length 1258.8
  Top Layer w5.5: TP27.1@5172.19,4475.26 5198.65,4475.26 5219.44,4454.47 5219.44,4347.23 v1(5223.37,4343.3) ; U8.31@5841.41,3977.25 5841.41,3963.19 v1(5854.37,3950.23)
  Sig2 w4.2: v1(5223.37,4343.3) 5244.07,4364 5362.52,4364 5390.02,4336.5 5390.02,4303.18 5364.53,4277.68 5364.53,4241.83 ; 5364.51,4222.18 5364.51,4241.82 ; 5364.53,4222.17 5364.53,4204.99 5478.2,4091.31 5478.2,4057.2 5504.1,4031.3 5579.29,4031.3 5632.5,3978.1 5632.5,3921.84 5658.07,3896.26 5715.37,3896.26 5738.33,3919.22 5808.79,3919.22 5839.07,3949.51 5853.64,3949.51 v1(5854.37,3950.23)
  Bottom Layer w5.5: v1(5223.37,4343.3) 5247.55,4367.46 R112.1@5249.35,4367.46
SW0: L2.2 R53.2 U1.10 | length 179.3
  Top Layer w10: U1.10@3436.29,4219.15 3436.29,4258.18 3448.11,4269.99
  Top Layer w12: 3448.11,4269.99 3448.11,4304.96 L2.2@3474.98,4331.83
  Top Layer w15: L2.2@3481.55,4331.26 R53.2@3532.13,4331.26
SW0_CAP: C31.1 R53.1 | length 30
  Top Layer w8: R53.1@3532.13,4301.21 C31.1@3562.13,4301.21
SW1: L3.2 R54.2 U1.12 | length 204.1
  Top Layer w10: U1.12@3396.92,4219.15 3396.92,4258.18
  Top Layer w12: L3.2@3346.24,4331.83 3352.11,4331.83 3352.96,4330.97 3386.61,4297.33 3386.61,4267.21 3393.05,4260.77 3394.33,4260.77 3396.92,4258.18 ; L3.2@3358.24,4331.83 L3.2@3362.21,4331.83
  Top Layer w15: R54.2@3295.13,4330.97 3352.96,4330.97 L3.2@3357.38,4330.97
SW1_CAP: C32.1 R54.1 | length 27
  Top Layer w10: C32.1@3268.13,4301.17 R54.1@3295.13,4301.17
SW2: L4.2 R55.2 U1.25 | length 183
  Top Layer w10: U1.25@3436.29,4097.89 3436.29,4058.86 3448.11,4047.05
  Top Layer w12: 3448.11,4047.05 3448.11,4012.08 L4.2@3474.98,3985.21
  Top Layer w15: L4.2@3474.98,3985.21 3475.12,3985.35 R55.2@3529.23,3985.35
SW2_CAP: C33.1 R55.1 | length 29.7
  Top Layer w10: R55.1@3559.04,3985.35 C33.1@3559.04,4015.09
SW3: L5.2 R56.2 U1.23 | length 190.9
  Top Layer w10: 3385.11,4047.05 3396.92,4058.86 U1.23@3396.92,4097.89
  Top Layer w12: L5.2@3358.24,3985.21 3385.11,4012.08 3385.11,4047.05
  Top Layer w15: R56.2@3296.04,3985.21 3344.24,3985.21 L5.2@3358.24,3985.21
SW3_CAP: C34.1 R56.1 | length 32.9
  Top Layer w10: R56.1@3264.23,3985.21 3264.23,3999.74 C34.1@3277.23,4012.74
UART_MUX_CTRL1: R19.1 S1.1 U18.1 U18.5 | length 2495.2
  Top Layer w5.5: R19.1@3605.65,4263.69 3605.65,4281.55 3597.58,4289.62 3597.58,4325.01 3602.16,4329.59 3598,4333.74 3598,4333.92 ; U18.5@3621.94,4329.59 3602.34,4329.59 3598,4333.92 ; U18.1@3685.32,4354.59 3685.32,4401.45 3672.02,4414.75 3609.84,4414.75 3596.8,4401.71 3596.8,4380.94 3598,4379.73 3598,4333.92 ; v1(4891,4544) 4935.36,4544 4940,4539.36 4940,4539.1 4951.75,4527.35 4951.75,4516.44 4960.88,4507.3 5189.08,4507.3 5232.06,4464.32 5232.06,4407.44 5252.67,4386.84 5296.21,4386.84 5307.32,4397.95 5331.06,4397.95 5356.75,4372.25 5356.75,4215.32 5405.37,4166.69 S1.1@5405.37,4135.46
  Sig1 w4.2: v1(3685.37,4401.5) 3708.59,4378.28 4368.52,4378.28 4416.5,4426.26 4525.73,4426.26 4541.64,4442.17 4541.64,4492.34 4605.05,4555.75 4794.02,4555.75 4808.2,4569.94 4865.06,4569.94 v1(4891,4544)
UART_MUX_CTRL2: R1.1 S1.2 U15.1 U15.5 | length 378.6
  Top Layer w5.5: v1(5455.37,4090.46) S1.2@5455.37,4135.46
  Bottom Layer w5.5: U15.1@5479.68,4044.92 5479.68,4066.16 v1(5455.37,4090.46) 5467.81,4102.9 5504.1,4102.9 5515.37,4114.17 5579.7,4114.17 5594.81,4099.06 5594.81,4034.01 5583.16,4022.36 5579.67,4022.36 5577.06,4019.75 R1.1@5577.06,4018.46 5576.94,4018.34 U15.5@5544.64,4018.34
USB_5V: FL2.1 J1.1
USB_5V_B: FL14.1 J5.1
USB_AR_RS232RX: R61.1 U18.4 | length 202.6
  Top Layer w5.5: v1(3614.55,4394.36) 3626.27,4382.64 U18.4@3626.27,4356.16
  Sig1 w4.2: v1(3567.24,4279) 3595.25,4307.02 3595.25,4375.06 v1(3614.55,4394.36)
  Bottom Layer w5.5: v1(3567.24,4279) 3577.24,4269 R61.1@3577.24,4258.57
USB_AR_RS232TX: R63.2 U18.2 | length 520.9
  Top Layer w5.5: v1(3639.5,4397) 3665.64,4370.87 U18.2@3665.64,4356.16 U18.2@3665.64,4354.59
  Bottom Layer w5.5: R63.2@3604,4141.99 3604,4127.75 3575.57,4099.32 3530.68,4099.32 3499.86,4130.14 3499.86,4175.4 3515,4190.54 3515,4257.03 3531.62,4273.65 3531.62,4286.28 3639.5,4394.16 v1(3639.5,4397)
USB_DM: J1.2 R60.2 | length 918.6
  Sig2 w4: v1(3128.29,4140.98) 3135.69,4148.38 3192.56,4148.38 3243,4198.82 3351.87,4198.82 3515.49,4362.44 3719.76,4362.44 3767.48,4410.16 3804.08,4410.16 v1@3823.87,4429.94
  Bottom Layer w4: v1(3128.29,4140.98) 3135.04,4147.73 3144.74,4147.73 3153.29,4139.19 J1.2@3172.66,4139.19 ; v1@3824.12,4430.19 3823.95,4430.03 3823.95,4424.78 3841.44,4407.29 3841.44,4392.31 3846.33,4387.42 R60.2@3846.82,4387.42
  other v1: 3824.12,4429.69
USB_DP: J1.3 R41.2 | length 936.8
  Sig2 w4: v1(3128.29,4162.98) 3132.9,4158.38 3188.41,4158.38 3238.86,4208.82 3347.73,4208.82 3511.35,4372.44 3715.62,4372.44 3774.82,4431.64 3781.65,4431.64 3784.02,4429.27 3784.02,4422.57 3786.44,4420.16 3792.08,4420.16 v1@3801.87,4429.94
  Bottom Layer w4: v1(3128.29,4162.98) 3135.04,4156.23 3145.03,4156.23 3153.58,4164.78 J1.3@3172.66,4164.78 ; v1@3801.87,4429.94 3792.96,4421.03 3792.96,4416.74 3796.23,4413.48 3823.23,4413.48 3832.94,4403.77 3832.94,4395.05 R41.2@3825.31,4387.42 R41.2@3825.31,4390.31
  other v1: 3802.12,4429.69
VBUS: R64.2 R65.2 U3.8 | length 77.6
  Bottom Layer w10: R64.2@3715.38,4114.81 3715.38,4128.71 3718.57,4131.9 R65.2@3718.57,4143.04 3722.17,4146.64 U3.8@3722.17,4189.59
VCC_BA_3V3: C5.1 C6.2 C9.2 C10.2 C11.1 C12.2 C40.1 C72.2 C105.2 C107.1 C109.2 C117.1 C119.1 C123.1 C125.1 FL22.2 J3.1 J7.1 L8.1 R1.2 R13.1 R16.1 R18.1 R38.2 R72.1 R77.1 R78.1 R80.1 R81.1 R82.1 R89.2 R94.2 R95.2 R104.2 R111.2 R118.2 R124.2 R177.1 R178.1 TP13.1 U4.1 U4.3 U5.5 U6.4 U7.3 U7.28 U10.14 U10.15 U11.5 U12.5 U13.14 U14.11 U15.8 U16.5 U17.5 | length 2370.7
  Top Layer w5.5: v1(4943,3901) 4960.36,3918.36 C40.1@4960.36,3934.38 4961.45,3935.47 4961.45,3947.8 4967.08,3953.43 4974.15,3953.43 4977.37,3956.65 R104.2@4977.37,3965.92 ; v1(6206.79,4423.21) C107.1@6223.22,4423.21 6225,4421.43 U13.14@6225,4370
  Top Layer w6: U11.5@4920.42,3935.72 C40.1@4957.61,3935.72
  Top Layer w8: U16.5@4863.37,4175.21 4863.37,4196.33 4853.37,4206.33 C72.2@4853.37,4207.46 4848.26,4207.46 4832.37,4223.35 4832.37,4262.14 4841.23,4271 4903.58,4271 v1(4911.71,4279.13) ; R124.2@4875.2,4471.7 4893.34,4471.7 v1(4893.63,4472) ; R89.2@5837.41,4411.08 5837.41,4400.27 v1(5851.11,4386.56)
  Top Layer w10: R13.1@4647.44,4516.76 4657.26,4526.58 4657.11,4526.73 v1(4657.11,4540) ; v1(4846.16,3801.37) FL22.2@4846.16,3821.15 ; R177.1@4849.59,4089.43 4901.92,4089.43 4928.74,4116.25 4928.74,4143.73 v1(4932.61,4147.6) 4929.21,4151 R178.1@4929.21,4169.46 ; R111.2@5148.42,4116.46 5148.42,4085.16 v1(5152,4081.58) ; R118.2@6185,4432.52 6197.48,4432.52 v1(6206.79,4423.21) ; U17.5@6343.09,3827.61 6361.36,3827.61 6367.97,3821 6367.97,3790.43 6375.61,3782.79 C109.2@6375.61,3768.9 6386,3768.9 6392,3762.9 v1(6392,3749)
  Top Layer w12: R16.1@5577.42,4484.46 5577.42,4510.51 5593.1,4526.19 J7.1@5636.47,4526.19
  Top Layer w15: TP13.1@4798.18,3771.83 4798.18,3774.39 v1(4825.33,3801.54) ; v1(5997.89,3891.9) 5997.96,3891.83 L8.1@6040.76,3891.83
  Bottom Layer w5.5: R72.1@5443.4,3894.46 5443.9,3894.96 5463.87,3894.96 v1@5464.37,3895.46 ; C123.1@5499.4,3956.46 U15.8@5499.36,3991.77 ; C123.1@5499.4,3956.46 5515.37,3956.46 v1(5518.07,3959.16) ; v1(5569.37,4067.2) 5577.06,4059.51 R1.2@5577.06,4039.49
  Bottom Layer w6: U14.11@5760.73,3850.95 U14.11@5760.73,3866.08
  Bottom Layer w8: R38.2@5293.71,4235.46 5300.05,4229.12 v1(5321.26,4229.12) ; R18.1@5363.78,4049.5 5380.65,4066.37 v1(5380.65,4081.19) ; v1(5386.38,4363) 5391.75,4357.63 U12.5@5444.19,4357.63
  Bottom Layer w10: R80.1@5123,3909.96 5138.72,3894.24 v1(5138.72,3891.42) 5157.67,3891.42 5163.64,3897.38 U7.3@5203.84,3897.38 ; v1@5160.25,3821.31 5160.25,3802.52 5197.04,3802.52 5197.1,3802.58 5197.1,3803.37 5225.9,3832.17 U7.28@5225.9,3837.42 ; R77.1@5163.43,4041.09 5152,4052.52 v1(5152,4081.58) 5174.99,4081.58 5191.96,4064.61 5214.26,4064.61 5232.04,4082.38 ; R78.1@5164.52,3987.37 v1(5184.66,3987.37) ; v1(5187.37,4444.34) 5199.84,4444.34 5199.89,4444.39 R95.2@5211.14,4444.39 ; U5.5@5251.98,4123.67 U5.5@5251.98,4136.6 ; U5.5@5251.98,4134.63 5251.98,4117.32 ; C125.1@5259.81,4102.9 5246,4102.9 ; C125.1@5260.82,4102.9 5260.82,4108.48 5251.98,4117.32 ; R82.1@5272.85,4051.22 5272.85,4067.98 5265.47,4075.36 5239.06,4075.36 5232.04,4082.38 ; U10.14@5298.93,4495.99 U10.14@5298.93,4496.97 5298.93,4535.37 5297.21,4537.08 5297.21,4545.14 v1(5311.86,4559.79) 5323.37,4548.28 5323.37,4524.02 5314.67,4515.32 U10.15@5314.67,4496.97 U10.15@5314.67,4496.49 ; R81.1@5355.94,4081.19 v1(5380.65,4081.19) ; v1(5572.77,3748.43) 5584.13,3737.07 C12.2@5598.06,3737.07 5597.44,3737.69 U6.4@5597.44,3788.66 ; U14.11@5760.73,3866.08 5769.11,3874.46 5779.46,3874.46 5797.1,3892.1 C119.1@5797.1,3897.4 ; C119.1@5797.1,3899.2 C119.1@5797.1,3897.4 ; v1(5818.29,3892.41) 5816.12,3892.41 5811.31,3897.23 5797.27,3897.23 C119.1@5797.1,3897.4 ; v1(6381,3999) 6380.87,3998.87 C5.1@6380.87,3977 6380.87,3964.9 6407.77,3938 ; 5232.04,4082.38 5232.04,4103.02 5232.15,4102.9 5246,4102.9 ; 5246,4102.9 5251.98,4108.87 5251.98,4117.32
  Bottom Layer w15: U4.1@6332.97,3905.76 6336.62,3902.11 6336.62,3871.38 6351,3857 6398,3857 6409,3868 6409,3904.53 U4.3@6407.77,3905.76 6407.77,3938
  other v1: 4835,3786 5160.28,3821.34 5464.37,3894.6
VCLK_1V8: C65.1 C66.1 C67.1 C68.1 FL7.2 FL9.2 U2.C15 U2.C18 | length 210.6
  Top Layer w10: v1(3836.01,4299.09) U2.C15@3851.76,4314.84 ; U2.C18@3851.76,4409.33 v1(3867.5,4393.58)
  Sig2 w10: v1(3836.01,4299.09) 3849.3,4312.39 3849.3,4375.38 v1(3867.5,4393.58)
  Bottom Layer w10: v1(3867.5,4393.58) 3873.35,4399.42 C68.1@3873.35,4409.24 ; C65.1@3891,4188 3891,4192.68 3881.34,4202.34 C66.1@3897,4218
VCO_1V8: C62.1 C63.1 C64.1 FL7.1 U2.A12 U2.C11 | length 244.4
  Top Layer w10: C63.1@3737.19,4215.47 3759.7,4215.47 v1(3764,4211.16) 3779.58,4211.16 U2.A12@3788.76,4220.35 ; U2.C11@3851.76,4188.85 v1(3867.5,4173.11)
  Sig1 w10: v1(3764,4211.16) 3764,4163.79 3776.3,4151.49 3814.59,4151.49 3836.2,4173.11 v1(3867.5,4173.11)
VDDR: C29.1 C35.1 C36.1 L7.2 U8.45 U8.48 | length 293.7
  Top Layer w10: U8.45@5965.43,4160.32 5965.5,4160.39 5994.3,4160.39 v1(5994.37,4160.46) ; U8.48@5965.43,4219.38 C36.1@5996.43,4219.38 5996.43,4235.42 v1(6000.37,4239.36)
  Sig2 w20: v1(5994.37,4160.46) 5994.37,4233.36 v1(6000.37,4239.36)
  Bottom Layer w10: C35.1@5969.55,4181.25 5969.73,4181.08 5986.19,4181.08 5992.84,4174.43 v1@5992.84,4161.99 ; L7.2@5980.15,4080.83 5973.28,4087.71 C29.1@5973.28,4142.46 v1@5992.81,4161.99
VDDS: C25.1 C26.1 C27.1 C28.1 C86.1 L8.2 R110.2 U8.13 U8.22 U8.34 U8.44 | length 926.3
  Top Layer w10: R110.2@5320.41,3724.46 5392.48,3724.46 v1(5432.29,3764.27) ; v1@5644.38,4244.36 5639.38,4239.36 C25.1@5639.38,4224.38 5641.18,4224.38 5646.18,4219.38 U8.13@5697.71,4219.38 ; v1@5645.38,4062.2 5640.38,4057.2 C26.1@5640.38,4042.21 U8.22@5697.71,4042.21 ; v1(5900.47,3950.73) U8.34@5900.47,3977.25 ; U8.44@5965.43,4140.64 5965.6,4140.46 5998.84,4140.46 6002.56,4136.74 6027.29,4136.74 6035.56,4128.46 C27.1@6037.36,4128.46 6037.37,4113.46 v1(6032.37,4108.46) ; L8.2@6028.3,3947.02 L8.2@6028.37,3946.95
  Top Layer w12: v1(5963.12,3949.86) 5966.73,3946.25 C28.1@5984.12,3946.25 5984.82,3946.95 L8.2@6028.37,3946.95
  Sig1 w10: v1(5432.29,3764.27) 5469.1,3801.08 5469.1,3832.9 5486.52,3850.32 5486.52,3972.24 5523.95,4009.66 5592.41,4009.66 5593.07,4009 v1(5646.27,4062.2)
  Bottom Layer w10: C86.1@5900.43,3935.35 v1@5900.43,3950.7
  other v1: 5645.27,4244.36
VIOIN_1V8: C59.1 C60.1 C61.1 FL10.2 U2.B1 U2.F1 U2.K1 U2.U2 U2.V11 | length 585.6
  Top Layer w5.5: v1(3804.51,3858.15) U2.B1@3820.26,3873.89 ; v1(3930.5,3858.15) U2.F1@3946.24,3873.89 ; U2.K1@4072.23,3873.89 v1(4087.98,3858.15) ; U2.U2@4292.7,3905.39 4309.57,3888.52 4340.79,3888.52 4346.63,3882.68 C60.1@4378.33,3882.68 ; v1(4308.45,4173.11) U2.V11@4324.2,4188.85
  Top Layer w10: v1(4276.95,3921.14) U2.U2@4292.7,3905.39
  PWR1 w10: v1(4087.98,3992.71) 4152.55,3992.71 4213.7,4053.85 4213.7,4143.54 4243.27,4173.11 v1(4308.45,4173.11)
  Bottom Layer w5.5: C61.1@4282,4185.3 4292.87,4185.3 4305.07,4173.11 v1(4308.45,4173.11)
  other v1: 4024.98,3992.71 4056.48,3992.71
X32K_Q1: C19.1 U8.3 Y3.1 | length 225
  Top Layer w5.5: C19.1@5765.79,4380.71 5786.59,4380.71 5797.72,4369.58 Y3.1@5808.9,4369.58 5826.24,4369.58 5836.84,4358.98 5836.84,4339.08 5842.05,4333.87 5842.05,4309.95 5886.47,4265.53 5894.37,4265.53 5900.47,4259.44 U8.3@5900.47,4244.97
X32K_Q2: C20.1 U8.4 Y3.2 | length 164.4
  Top Layer w5.5: C20.1@5765.79,4315.14 5769.64,4315.14 5780.77,4326.27 Y3.2@5808.9,4326.27 5818.54,4326.27 5825.63,4319.18 5825.63,4308.18 5874.57,4259.24 5874.57,4258.26 5880.78,4252.05 U8.4@5880.78,4244.97
X48M_N: C18.1 U8.46 Y2.3 | length 187.6
  Top Layer w4: U8.46@5965.43,4180.01 5972.51,4180.01 5976.86,4184.35 6008.44,4184.35 6031.22,4184.35 C18.1@6038.8,4176.76 6038.8,4178.56 6049.1,4188.85 6107.66,4188.85 6126.55,4169.96 Y2.3@6126.55,4162.29
X48M_P: C17.1 U8.47 Y2.1 | length 140
  Top Layer w4: U8.47@5965.43,4199.69 5972.51,4199.69 5976.86,4195.35 6013,4195.35 6031.22,4195.35 6033.83,4197.96 6035.63,4197.96 6038.8,4201.13 C17.1@6038.8,4202.93 6041.88,4199.85 6048.29,4199.85 6052.65,4199.85 6073.36,4199.85 Y2.1@6090.91,4217.41
XIN32: C38.1 U7.27 Y4.1 | length 112.9
  Bottom Layer w5.5: Y4.1@5241.17,3740.88 5241.17,3762.93 5251.43,3773.2 5251.43,3795.13 5253.12,3796.82 5253.12,3820.41 5245.67,3827.87 U7.27@5245.67,3845.7
XOUT32: C39.1 U7.26 Y4.2 | length 112.7
  Bottom Layer w5.5: U7.26@5265.35,3845.7 5265.35,3819.96 5275.14,3810.17 5275.14,3795.3 5275.14,3774.34 5284.47,3765.01 Y4.2@5284.47,3740.88
pads on no net: A1.2-3 A1.5-6 Designator1. Designator1_1. Designator2. Designator2_1. Designator3. Designator3_1. Designator4. Designator4_1. Designator5. Designator5_1. Designator5_2. Designator6. Designator7. Designator8. Designator10. Designator22_1. Designator23. FID1.1 FID2.1 FID3.1 FID4.1 FID5.1 FID6.1 J1.4 J2.1 J2.3 J2.4 J2.5 J2.6 J2.7 J2.9 J2.MH1 J2.MH2 J4.4 J5.2 J5.3 J5.4 J6.4 J9.2@5173.9,4283.6 J9.3@5292.01,4283.6 RA2.1 RA2.8 RA5.4 RA5.5 S2.4 S2.5 U1. U2.A3 U2.A4 U2.B3 U2.B4 U2.B5 U2.C3 U2.C4 U2.C5 U3.10 U3.11 U3.14 U3.15 U3.16 U3.18 U3.19 U3.21 U3.22 U3.23 U3.24 U7.1 U7.7 U7.8 U7.12 U7.13 U7.15 U7.16 U7.18 U7.21 U7.22 U7.23 U7.24 U8.5 U8.6 U8.9 U8.10 U8.12 U8.18 U8.19 U8.20 U8.28 U8.32 U8.36 U8.37 U8.38 U8.39 U8.40 U8.41 U8.42 U8.43 U12.9@5457.58,4302.51 U12.9@5507.58,4302.51 U17.9@6287.97,3841 U17.9@6287.97,3891 U19.9@6109.37,3825.66 U19.9@6109.37,3875.27

## Polygon pours and split planes (outlines as drawn)
RE on Top Layer "Top Layer-RE" (solid, remove dead copper, pour order 493): 6540.72,4398.89 6564.34,4398.89 6564.34,4587.86 6540.72,4587.86
5V_IN_B on Top Layer "Top Layer-5V_IN_B" (solid, remove dead copper, pour order 491): 6197,4124 6206,4133 6276,4133 6318,4133 6325,4126 6325,4051 6321,4047 6205,4047 6197,4055
USB_5V_B on Top Layer "Top Layer-USB_5V_B" (solid, remove dead copper, pour order 489): 6338,4138.4 6378.89,4138.4 6395.42,4121.87 6402.92,4114.37 6470,4114.37 6476,4108.37 6476,4096.37 6471,4091.37 6338,4091.37 6338,4113.37
no net on Top Layer "Top Layer-No Net" (solid, remove dead copper, pour order 477): 6335,4190
GND on Top Layer " " (solid, remove dead copper, pour order 428): 6462.4,4602.09 6462.4,4476 6094.58,4476 6094.58,4239.36 5840,4239.36 5840,4602.01
GND on Top Layer " " (solid, remove dead copper, pour order 495): 6117.79,4247.89 6117.79,4457 6461.9,4457 6461.9,4318.4 6592,4318.4 6592,3727 6558.63,3693.63 6491,3693.63 4391.1,3693.98 4391.1,4599.81 5818.71,4599.81 5818.71,4287.56 5894.15,4212.11 6082.01,4212.11
GND on Top Layer " " (solid, remove dead copper, pour order 465): 3261.1,4211.1 3261.1,4188.61 3268.49,4181.22 3268.49,4153.29 3150.01,4153.29 3125.63,4177.67 3125.63,4270.32 3146.11,4290.8 3191.47,4290.8 3203.02,4279.24 3203.02,4230.58 3222.51,4211.1